# Altium PCB DSPpanel_v2.PcbDoc (part 2 of 2)
Units mil, origin at the board's own origin, x right, y up, seen from the top; angles counter-clockwise.
Board outline 3920 x 2100 mil, 2 copper layers (Top Layer, Bottom Layer); 189 components, 149 nets, 769 pads, 209 vias.
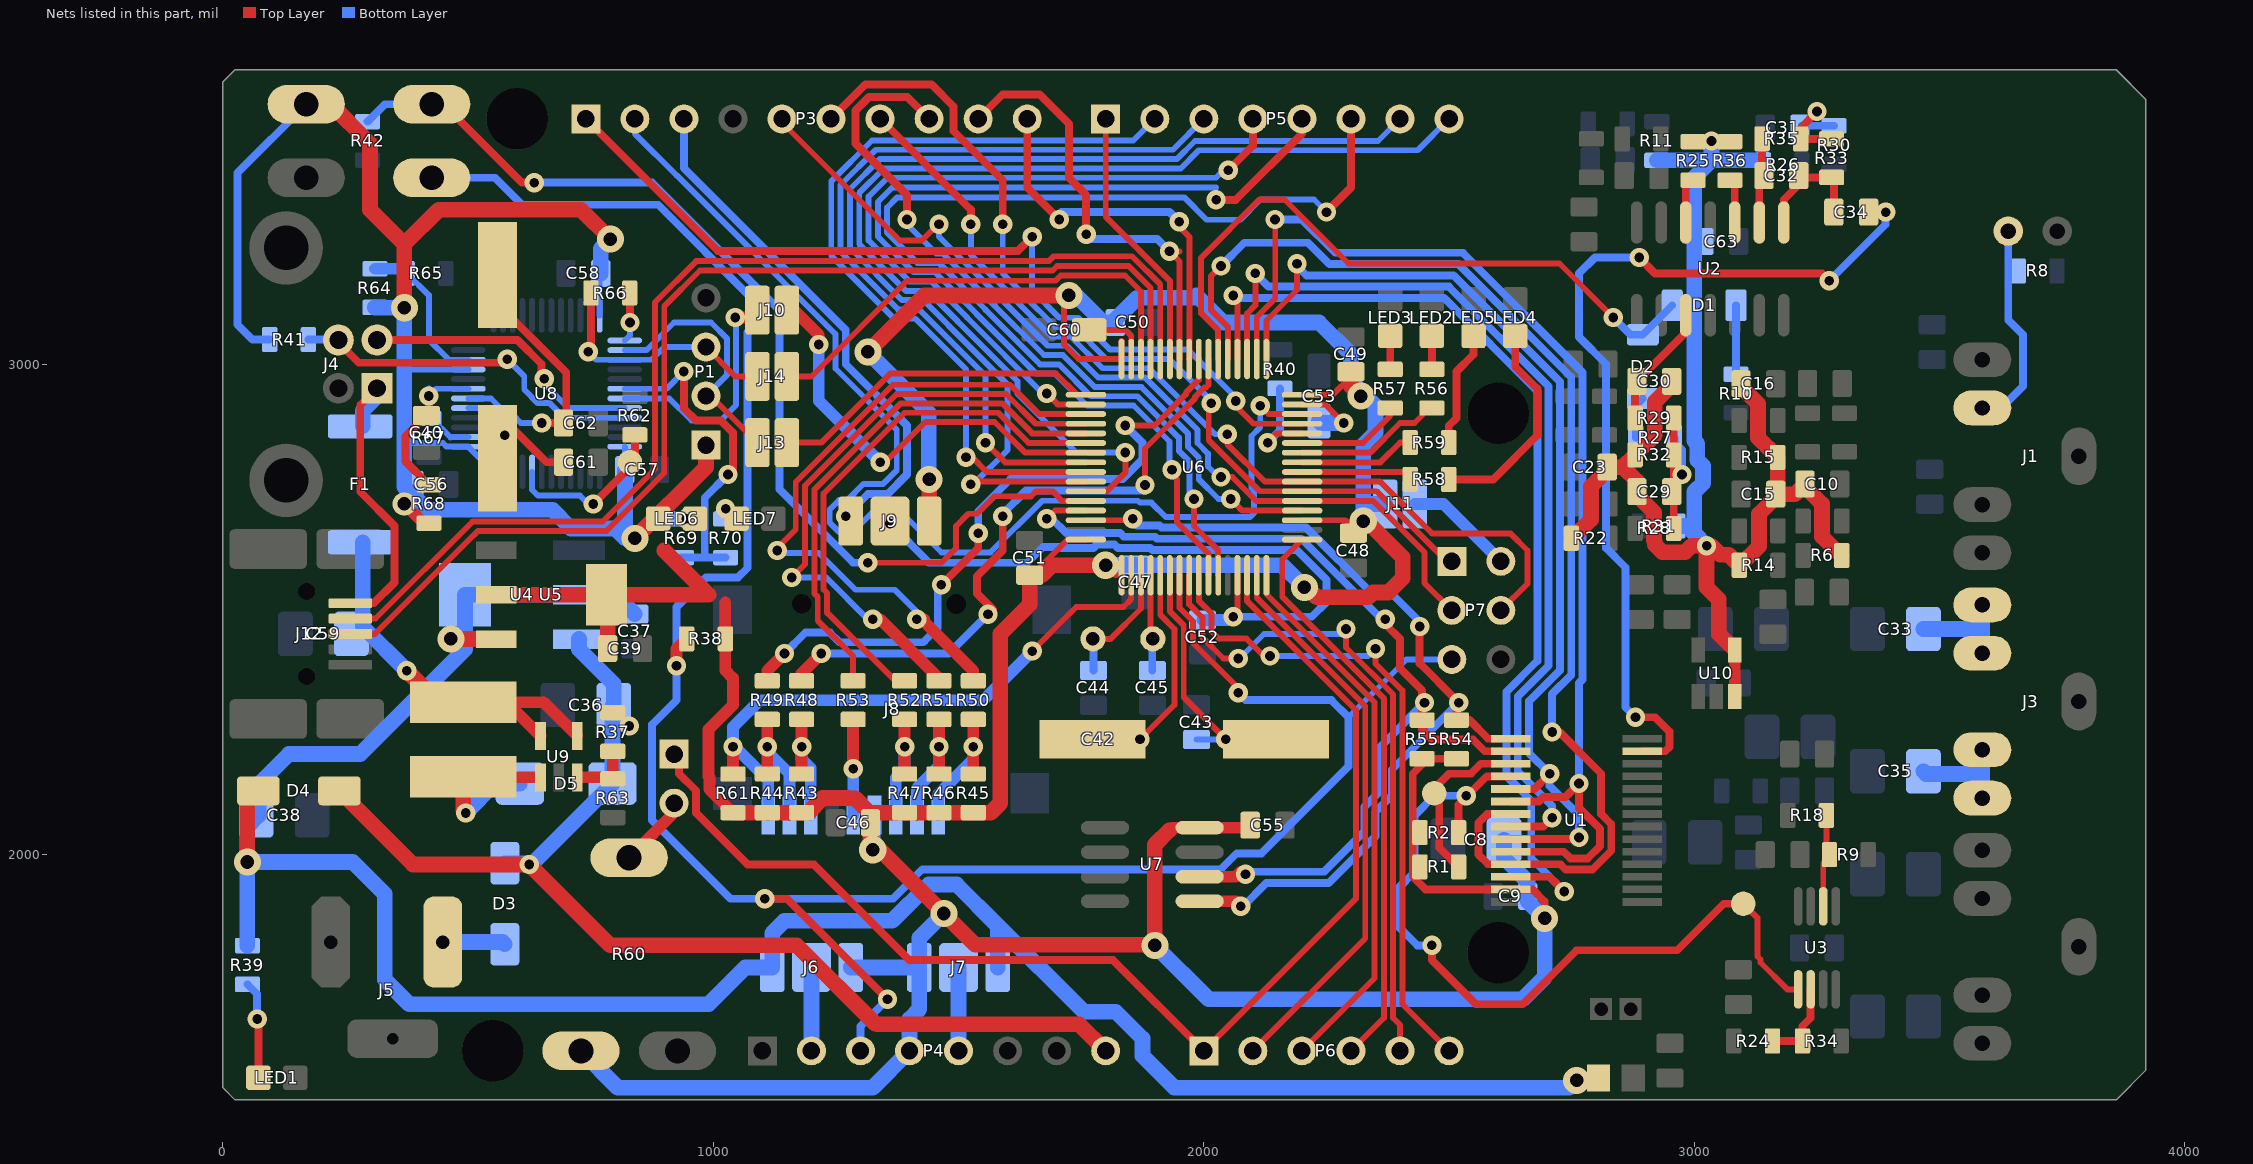
[diagram p2: the nets of this part, all layers, seen from the top]

## Via types
v1: diameter 39.37, hole 19.68, Top Layer to Bottom Layer, tented both sides, 146 vias
v2: diameter 55.12, hole 27.56, Top Layer to Bottom Layer, tented both sides, 49 vias
v3: diameter 59.06, hole 59.06, Top Layer to Bottom Layer, 9 vias
v4: diameter 47.24, hole 27.56, Top Layer to Bottom Layer, tented both sides, 3 vias
v5: diameter 39.37, hole 19.68, Top Layer to Bottom Layer, 2 vias

## Nets (pads, with @x,y where several pads share a name; then routed paths per layer and width w, separated by ;. In a path a pad name is that pad's centre, name@x,y a point inside that pad or via, vN(x,y) a via of type N, cw(c..) or ccw(c..) an arc to the next point about the centre after c; other vN are vias at no path point) (continued)
NetC29_1: C29.1 R27.2 R28.1 R29.2 R32.1 | length 309.7
  Top Layer w16: R28.1@2957.91,2665 2957.91,2736.06 C29.1@2953.98,2740 2957.91,2743.94 R32.1@2957.91,2815 R29.2@2957.91,2890
  Bottom Layer w16: R27.2@2959.37,2850 2959.37,2840.63 2975,2825 v1(2975,2775)
NetC30_1: C30.1 R29.1 U2.10 | length 252.5
  Top Layer w16: R29.1@2879.17,2890 2879.17,2961.06 C30.1@2883.11,2965 2982.48,3064.37 U2.10@2982.48,3099.72
NetC31_1: C31.1 R30.2 R33.2 R35.2 | length 197.5
  Top Layer w16: v1(3250,3515) 3217.01,3482.01 3217.01,3459.37 R33.2@3280,3459.37
  Bottom Layer w16: C31.1@3219.8,3485.91 R30.2@3285,3485.91
NetC32_1: C32.1 C34.2 R33.1 U2.1 | length 237.7
  Top Layer w12: C32.1@3212.91,3365.51 C32.1@3212.91,3384.21
  Top Layer w16: U2.1@3182.48,3288.7 3182.48,3335.08 C32.1@3212.91,3365.51 ; C32.1@3216.5,3380.63 R33.1@3280,3380.63 ; C34.2@3284.57,3310 R33.1@3284.57,3376.06
NetC32_2: C32.2 R35.1 U2.2 | length 170.5
  Top Layer w16: U2.2@3132.48,3288.7 3132.48,3374.65 C32.2@3142.05,3384.21 ; C32.2@3138.11,3388.15 R35.1@3138.11,3459.21
NetC33_2: C33.2 J3.2 J3.4 | length 218.6
  Bottom Layer w32: C33.2@3467.09,2460 3587.24,2460 ; J3.4@3587.24,2410.63 3587.24,2460 ; J3.2@3587.24,2509.06 3587.24,2460
NetC34_1: C34.1 U1.27 | length 1855.3
  Top Layer w16: v1(2880,2280) 2920,2280 2949.21,2250.79 2949.21,2219.21 2940.75,2210.75 U1.27@2893.86,2210.75 ; v1(2887.44,3217.56) 2920,3185 3260,3185 v1(3275,3170)
  Bottom Layer w16: v1(2880,2280) 2859.44,2300.56 2859.44,2585.75 2820.19,2625 2820.19,2999.97 2765,3055.16 2765,3185.19 2797.37,3217.56 v1(2887.44,3217.56) ; v1(3275,3170) 3390,3285 v1(3390,3310)
NetC35_2: C35.2 J3.3 J3.5 | length 220.8
  Bottom Layer w32: C35.2@3467.09,2170 3472.52,2164.57 3587.24,2164.57 ; J3.3@3587.24,2115.35 3587.24,2164.57 ; J3.5@3587.24,2213.78 3587.24,2164.57
NetC36_1: C36.1 D3.K D4.K D5.K P4.8 R37.2 U4.3 | length 2388.6
  Top Layer w32: D4.K@237.68,2130 387.68,1980 v1(625,1980) ; v1@630,1975 790,1815 1170,1815 1330,1655 1333.5,1655 1334.06,1654.44 1745.56,1654.44 P4.8@1800,1600
  Bottom Layer w32: D3.K@575,1982.68 622.32,1982.68 v1(625,1980) 629.49,1980 D5.K@794.49,2145 794.49,2302.4 C36.1@797.09,2305 797.09,2347.91 726.14,2418.86 U4.3@726.14,2439.45
  other v1: 828.46,2262.41
NetC40_2: C40.2 R68.2 U8.7 | length 307.2
  Top Layer w16: R68.2@420,2754.37 419.62,2754.37 372.44,2801.55 372.44,2852.87 C40.2@415,2895.43 420,2900.43 v1(420,2935)
  Bottom Layer w12: v1(420,2935) 434.84,2949.84 U8.7@500.55,2949.84 ; v1@420,2950 v1@420.16,2949.84
NetC42_1: C42.1 U6.5 Y1.2 | length 425.1
  Top Layer w12: v5(1870,2235) 1940,2305 1940,2460 1911.1,2488.9 U6.5@1911.1,2569.53
  Bottom Layer w12: C42.1@1820.43,2235 v5(1870,2235)
NetC43_1: C43.1 U6.6 Y1.1 | length 442
  Top Layer w12: U6.6@1930.79,2569.53 1930.79,2496.08 1959,2467.87 1959,2321 v5(2045,2235)
  Bottom Layer w12: C43.1@1985,2234.57 1985.43,2235 v5(2045,2235)
NetC44_2: C44.2 U6.3 Y2.2 | length 256.1
  Top Layer w12: Y2.2@1773.98,2440 1810,2440 1871.73,2501.73 U6.3@1871.73,2569.53
  Bottom Layer w16: Y2.2@1773.98,2440 1775,2438.98 C44.2@1775,2375.43
NetC45_2: C45.2 U6.4 Y2.1 | length 196.4
  Top Layer w12: U6.4@1891.42,2569.53 1891.42,2444.61 Y2.1@1896.02,2440
  Bottom Layer w16: C45.2@1895,2375.43 1895,2438.98 Y2.1@1896.02,2440
NetC52_2: C52.2 J9.2 U6.13 | length 1372.1
  Top Layer w12: v1(2060,2485) 2068.58,2493.58 U6.13@2068.58,2569.53
  Bottom Layer w16: v1(1360,2675) 1440,2595 1639.81,2595 1672.37,2627.56 1707.63,2627.56 1710.07,2625.12 1774.93,2625.12 1782.37,2632.56 1817.63,2632.56 1825.07,2625.12 1890.89,2625.12 1895.01,2621 2189.19,2621 2250,2560.19 2250,2515 2220,2485 v1(2060,2485)
  Bottom Layer w24: C52.2@1997,2478.43 2053.43,2478.43 v1(2060,2485)
NetC53_1: C53.1 U6.31 | length 151.8
  Top Layer w12: U6.31@2200.47,2917.95 2247.05,2917.95 v1(2285,2880)
  Bottom Layer w32: C53.1@2235,2883.82 2238.82,2880 v1(2285,2880)
NetC59_1: C59.1 F1.2 L2.1 U9.4 U9.5 | length 798.4
  Top Layer w24: L2.1@490,2310.79 L2.1@579.13,2310.79 ; U9.5@647.6,2242.32 L2.1@579.13,2310.79 ; U9.4@722.4,2242.32 653.94,2310.79 L2.1@579.13,2310.79
  Top Layer w32: v1(375,2375) 439.21,2310.79 L2.1@490,2310.79
  Bottom Layer w32: F1.2@285,2636.89 285,2465 v1(375,2375)
NetC60_1: C60.1 U6.47 | length 138.3
  Top Layer w12: C60.1@1766.18,3070 1840,3070 1852.05,3057.95 U6.47@1852.05,3010.47
NetC61_1: C61.1 U8.5 Y3.2 | length 247.5
  Top Layer w16: Y3.2@575,2885 660,2800 C61.1@694.57,2800
  Bottom Layer w12: U8.5@500.55,2910.47 539.53,2910.47 v1@577.5,2872.5
  other v1: 575,2855
NetC62_2: C62.2 U8.6 Y3.1 | length 571.4
  Top Layer w16: Y3.1@560,3182.01 560,3122.94 700,2982.94 700,2895 685,2880 v1(650,2880)
  Bottom Layer w12: U8.6@500.55,2930.16 546.71,2930.16 581.31,2895.56 591.8,2895.56 607.36,2880 v1(650,2880)
NetD1_A: D1.A D2.A U6.38 | length 1369.5
  Top Layer w12: U6.38@2029.21,3010.47 2029.21,3068.92 1994.44,3103.69 1994.44,3216.8 2113.2,3335.56 2164.44,3335.56 2295,3205 2725,3205 v1(2835,3095)
  Bottom Layer w16: v1(2835,3095) 2870.04,3059.96 D2.A@2895,3059.96 D1.A@2955.04,3120
NetD1_K: D1.K R10.2 | length 140.6
  Bottom Layer w16: D1.K@3084.96,3120 R10.2@3085,2979.37 R10.2@3085,2979.37
NetD2_K: D2.K R27.1 | length 86
  Bottom Layer w16: R27.1@2880.63,2850 2880.63,2915.67 D2.K@2895,2930.04
NetD3_A: D3.A J5.3 | length 128.3
  Bottom Layer w32: J5.3@448.62,1821.85 570.47,1821.85 D3.A@575,1817.32
NetD5_A: D5.A L2.2 U9.1 | length 362.3
  Top Layer w24: L2.2@490,2159.21 491.54,2157.68 U9.1@640,2157.68
  Top Layer w32: L2.2@490,2159.21 490,2090 v1(495,2085)
  Bottom Layer w32: v1(495,2085) 555,2145 D5.A@605.51,2145
NetF1_1: F1.1 J4.1 J12.1 | length 641.5
  Top Layer w16: J12.1@259.8,2512.87 307.87,2512.87 350,2555 350,2670 280,2740 280,2916.42 J4.1@314.37,2950.79
  Bottom Layer w32: F1.1@285,2873.11 285,2905 314.37,2934.37 J4.1@314.37,2950.79 J4.1@317.91,2947.24
NetJ1_4: J1.4 MIC1.1 R8.1 | length 429.8
  Bottom Layer w16: J1.4@3587.24,2910.63 3625.63,2910.63 3670,2955 3670,3060 3640,3090 MIC1.1@3640,3271.26
NetJ4_2: J4.2 U8.32 | length 589.2
  Top Layer w12: J4.2@309.21,3049.21 J4.2@314.37,3049.21
  Top Layer w16: J4.2@314.37,3049.21 600.79,3049.21 650,3000 v1@650,2967.5
  Bottom Layer w12: v1@647.5,2967.5 704.53,2910.47 U8.32@819.45,2910.47
  other v1: 655,2970
NetJ4_3: J4.3 R41.1 U8.33 | length 736.8
  Top Layer w12: J4.3@235,3049.84 J4.3@235.63,3049.21
  Top Layer w16: J4.3@235.63,3049.21 235.63,3044.37 277.28,3002.72 572.72,3002.72 v1(580,3010)
  Bottom Layer w12: v1(580,3010) 614.44,2975.56 614.44,2948.2 642.08,2920.56 666.8,2920.56 696.57,2890.79 U8.33@819.45,2890.79
  Bottom Layer w16: R41.1@174.37,3050 234.84,3050 J4.3@235.63,3049.21
NetJ6_2: J6.2 P4.2 | length 170
  Bottom Layer w32: P4.2@1200,1600 J6.2@1200,1770
NetJ7_2: J7.2 P4.5 | length 170
  Bottom Layer w32: P4.5@1500,1600 J7.2@1500,1770
NetJ8_1: J8.1 R45.1 R50.1 | length 279.9
  Top Layer w24: R45.1@1530,2164.37 v1(1530,2220) R50.1@1530,2275.63
  Bottom Layer w24: J8.1@1458.47,2081 1458.47,2123.47 1530,2195 v1(1530,2220)
NetJ8_2: J8.2 R46.1 R51.1 | length 268.8
  Top Layer w24: R46.1@1460,2164.37 v1(1460,2220) R51.1@1460,2275.63
  Bottom Layer w24: J8.2@1415.16,2081 1415.16,2135.16 1460,2180 v1(1460,2220)
NetJ8_3: J8.3 R47.1 R52.1 | length 257.8
  Top Layer w24: R47.1@1390,2164.37 v1(1390,2220) R52.1@1390,2275.63
  Bottom Layer w24: J8.3@1371.85,2081 1371.85,2156.85 1390,2175 v1(1390,2220)
NetJ8_5: J8.5 R53.1 | length 194.7
  Top Layer w24: v1(1285,2175) R53.1@1285,2275.63
  Bottom Layer w24: v1(1285,2175) 1285.24,2174.76 J8.5@1285.24,2081
NetJ8_7: J8.7 R43.1 R48.1 | length 258
  Top Layer w24: R43.1@1180,2164.37 v1(1180,2220) R48.1@1180,2275.63
  Bottom Layer w24: v1(1180,2220) 1180,2195 1198.62,2176.38 J8.7@1198.62,2081
NetJ8_8: J8.8 R44.1 R49.1 | length 269
  Top Layer w24: R44.1@1110,2164.37 R49.1@1110,2275.63
  Bottom Layer w24: v1(1110,2220) 1110,2210 1155.32,2164.68 J8.8@1155.32,2081
NetJ8_9: J8.9 R61.1 U6.2 | length 1235.5
  Top Layer w12: v1(1650,2415) 1740,2505 1836.36,2505 1852.05,2520.68 U6.2@1852.05,2569.53
  Top Layer w24: R61.1@1040,2164.37 v1(1040,2220)
  Bottom Layer w24: J8.9@1112.01,2081 1112.01,2151.73 1043.74,2220 v1(1040,2220) 1040,2260 1095,2315 1550,2315 v1(1650,2415)
NetJ9_1: J9.1 P3.3 | length 1073.7
  Bottom Layer w16: P3.3@940,3500 940,3399.81 1270,3069.81 1270,3000 1395,2875 1395,2775 1355,2735 1315,2735 v1(1270,2690)
NetJ10_1: J10.1 U8.31 | length 489.2
  Top Layer w24: v1(1045,3095) 1075,3095 J10.1@1090,3110
  Bottom Layer w12: U8.31@819.45,2930.16 910.16,2930.16 955.32,2885 1015,2885 1046.53,2916.53 1046.53,3093.47 v1(1045,3095)
NetJ10_2: J10.2 U6.55 | length 881
  Top Layer w12: v1@1345,2795 1432,2882 1573.16,2882 1635.63,2819.53 U6.55@1759.53,2819.53
  Top Layer w24: J10.2@1150,3110 1165,3110 1215,3060 v1(1215,3040)
  Bottom Layer w24: v1(1215,3040) 1215,2925 v1@1345,2795
  other v1: 1340,2800
NetJ11_2: J11.2 P7.2 | length 224
  Bottom Layer w24: J11.2@2430,2715 2488.54,2715 P7.2@2605.51,2598.03
NetJ12_2: J12.2 U6.44 | length 2332.3
  Top Layer w12: J12.2@259.8,2481.38 311.38,2481.38 509,2679 774,2679 881,2786 881,3126 965,3210 1683.9,3210 1693.9,3220 1853.74,3220 1911.1,3162.64 U6.44@1911.1,3010.47
NetJ12_3: J12.3 U6.45 | length 2305
  Top Layer w12: J12.3@259.8,2449.88 309.88,2449.88 503.46,2643.46 503.46,2643.65 511.07,2651.27 511.27,2651.27 520,2660 781.87,2660 900,2778.13 900,3118.13 972.87,3191 1691.77,3191 1700.77,3200 1846.87,3200 1891.42,3155.45 U6.45@1891.42,3010.47
NetJ13_1: J13.1 U6.49 | length 685.5
  Top Layer w12: J13.1@1150,2840 1220,2840 1360.56,2980.56 1698.79,2980.56 1741.71,2937.64 U6.49@1759.53,2937.64
NetJ13_2: J13.2 P1.2 U8.26 | length 524.4
  Top Layer w12: P1.2@985,2935 995,2935 J13.2@1090,2840
  Bottom Layer w12: U8.26@819.45,3028.58 863.58,3028.58 920,3085 995.14,3085 1027.53,3052.62 1027.53,2977.53 P1.2@985,2935
NetJ14_1: J14.1 U6.46 | length 958
  Top Layer w12: J14.1@1150,2975 1200,2975 1395,3170 1697.64,3170 1708.2,3180.56 1839.44,3180.56 1871.73,3148.27 U6.46@1871.73,3010.47
NetJ14_2: J14.2 P1.3 R66.1 U8.27 | length 501.7
  Top Layer w12: P1.3@985,3035 1045,2975 J14.2@1090,2975
  Top Layer w16: v1@750.63,3030.63 R66.1@750.63,3145
  Bottom Layer w12: v1(745,3025) 761.1,3008.9 U8.27@819.45,3008.9 873.9,3008.9 900,3035 P1.3@985,3035
NetLED1_A: LED1.A R39.1 | length 199.9
  Top Layer w16: v1(70,1665) 72.5,1662.5 LED1.A@72.5,1545
  Bottom Layer w16: R39.1@50,1735.63 70,1715.63 v1(70,1665)
NetLED2_A: LED2.A R56.1 | length 68.1
  Top Layer w16: R56.1@2465,2994.37 LED2.A@2465,3062.5
NetLED3_A: LED3.A R57.1 | length 68.1
  Top Layer w16: R57.1@2380,2994.37 LED3.A@2380,3062.5
NetLED4_A: LED4.A R58.1 | length 444
  Top Layer w16: R58.1@2499.37,2765 2590,2765 2680,2855 2680,2950 2635,2995 LED4.A@2635,3062.5
NetLED5_A: LED5.A R59.1 | length 243.5
  Top Layer w16: R59.1@2499.37,2840 2499.37,2874.37 2515,2890 2515,2985 2550,3020 LED5.A@2550,3062.5
NetLED6_K: LED6.K R69.2
  other v1: 945,2685
NetLED7_A: LED7.A R70.1
  other v1: 1025,2705
NetP3_1: P3.1 U6.29 | length 1824.5
  Top Layer w12: v1@2072.5,2927.5 2072.5,2907.5 2101.42,2878.58 U6.29@2200.47,2878.58
  Top Layer w16: P3.1@740,3500 1009,3231 1621,3231 v1(1650,3260)
  Bottom Layer w12: v1@1637.5,3267.5 1650,3255 1650,3150 1705.44,3094.56 1744.02,3094.56 1809.02,3029.56 1967.8,3029.56 v1@2067.36,2930
  other v1: 2065,2925
NetP3_2: P3.2 U6.30 | length 2448.3
  Top Layer w12: v1(2115,2915) 2131.73,2898.27 U6.30@2200.47,2898.27
  Bottom Layer w12: P3.2@840,3500 840,3470 925.04,3384.96 925.15,3384.96 1249,3061.11 1249,2991.3 1374,2866.3 1374,2783.7 1346.3,2756 1306.3,2756 1272.99,2722.69 1256.46,2722.69 1237.31,2703.54 1237.31,2676.46 1256.46,2657.31 1283.54,2657.31 1333.91,2707.69 1373.54,2707.69 1465.22,2616 1564.78,2616 1670.34,2721.56 1865.9,2721.56 1869.78,2717.69 1893.07,2717.69 1922.76,2688 2094.22,2688 2102.69,2696.46 2102.69,2742.31 2097.31,2747.69 2097.31,2853.54 2115,2871.22 v1(2115,2915)
NetP3_5: P3.5 P7.3 U6.21 | length 1912.7
  Top Layer w12: P3.5@1140,3492.64 1380.64,3252 1425,3252 1458,3285 v1(1460,3285) ; v1(2035,2770) 2058.13,2770 2107.03,2721.1 U6.21@2200.47,2721.1 2345.16,2721.1 2450,2616.26 2450,2553.54 P7.3@2505.51,2498.03
  Top Layer w16: P3.5@1140,3494.81 P3.5@1140,3500
  Bottom Layer w12: v1(1460,3285) 1467.64,3285 1460,3277.36 1460,3260 1593,3127 1593,3126.39 1681.83,3037.56 1720.41,3037.56 1785.41,2972.56 1880.41,2972.56 1987,2865.97 1987,2839.1 2008.56,2817.54 2008.56,2791.44 v1@2040,2760
NetP3_6: P3.6 P7.1 U6.22 | length 1913.9
  Top Layer w12: v1(2015,2920) 2020,2920 2025,2915 2020,2915 2010,2905 2010,2845 2114.21,2740.79 U6.22@2200.47,2740.79 2352.34,2740.79 2495.1,2598.03 P7.1@2505.51,2598.03
  Top Layer w16: P3.6@1240,3500 1310,3570 1445,3570 1490,3525 1490,3475 1590,3375 v1(1590,3285)
  Bottom Layer w12: v1(1590,3285) 1590,3185 1631,3144 1631,3142.13 1697.57,3075.56 1736.15,3075.56 1801.15,3010.56 1929.44,3010.56 2020,2920 v1(2015,2920)
NetP3_7: P3.7 P7.4 U6.23 | length 1895.7
  Top Layer w12: v1(2048,2857) 2048,2837 2124.53,2760.47 U6.23@2200.47,2760.47 2359.53,2760.47 2465,2655 2625,2655 2660,2620 2660,2552.52 P7.4@2605.51,2498.03
  Top Layer w16: P3.7@1340,3500 1525,3315 v1(1525,3285)
  Bottom Layer w12: v1(1525,3285) 1525,3223.13 1612,3136.13 1612,3134.26 1689.7,3056.56 1728.28,3056.56 1793.28,2991.56 1888.28,2991.56 2022.84,2857 v1(2048,2857)
NetP3_8: P3.8 U6.20 | length 1527.5
  Top Layer w12: v1@2055,2715 2065,2715 2078.58,2701.42 U6.20@2200.47,2701.42
  Top Layer w16: v1(1395,3295) 1395,3345 1290,3450 1290,3517 1317.53,3544.53 1395.47,3544.53 P3.8@1440,3500
  Bottom Layer w12: v1@1395,3285 1454.56,3225.44 1467.69,3225.44 1574,3119.13 1574,3118.52 1673.96,3018.56 1712.54,3018.56 1777.54,2953.56 1872.54,2953.56 1968,2858.1 1968,2831.23 1989.56,2809.67 1989.56,2765.44 2030,2725 2045,2725 v1@2050,2720
  other v1: 2055,2725
NetP3_9: P3.9 U6.42 | length 879.1
  Top Layer w12: v1(1930,3230) 1950.47,3209.53 U6.42@1950.47,3010.47 ; 1950,3230 1950.47,3229.53
  Top Layer w16: P3.9@1540,3500 1590,3550 1665,3550 1725,3490 1725,3380 1760,3345 v1(1760,3265)
  Bottom Layer w16: v1@1760,3255 1905,3255 v1(1930,3230)
NetP3_10: P3.10 U6.41 | length 761.3
  Top Layer w12: v1(1950,3290) 1950,3280 1970.56,3259.44 1970.56,3010.87 U6.41@1970.16,3010.47
  Top Layer w16: P3.10@1640,3500 1640,3360 v1@1700,3300
  Bottom Layer w16: v1@1710,3310 1930,3310 v1(1950,3290)
  other v1: 1705,3295
NetP4_3: P4.3 P7.5 R38.2 S1.1 U6.7 | length 4953.5
  Top Layer w12: U6.7@1950.47,2569.53 1950.47,2503.27 1978,2475.74 1978,2432 2080,2330 v1(2070,2330)
  Top Layer w16: v1(1105,1910) 1150,1910 v1(1355,1705)
  Top Layer w24: v1(925,2385) 925,2419.37 R38.2@945.63,2440
  Bottom Layer w12: 2295,2280 2413.03,2398.03 P7.5@2505.51,2398.03
  Bottom Layer w16: S1.1@425.91,3380 555,3380 610,3325 887.47,3325 1080,3132.47 1080,3075 1070,3065 1070,2585 1050,2565 985,2565 925,2505 v1(925,2385) 925,2315 875,2265 875,2070 1035,1910 v1(1105,1910) 1366.16,1910 1426.16,1970 2034.81,1970 2067.37,2002.56 2117.56,2002.56 2295,2180 2295,2280 2260,2315 2085,2315 ; P4.3@1300,1600 1300,1650 v1(1355,1705)
NetP5_1: P5.1 U6.43 | length 543.7
  Top Layer w12: P5.1@1800,3500 1800,3300.61 1930.79,3169.82 U6.43@1930.79,3010.47
NetP5_2: P5.2 U6.57 | length 1670.9
  Top Layer w12: v1(1515,2810) 1527.64,2810 1557.48,2780.16 U6.57@1759.53,2780.16
  Bottom Layer w12: v1(1515,2810) 1515,2989.43 1411.99,3092.44 1368.98,3092.44 1240.44,3220.98 1240.44,3372.92 1323.52,3456 1856,3456 P5.2@1900,3500
NetP5_3: P5.3 U6.56 | length 1690.3
  Top Layer w12: v1(1555,2840) 1595.16,2799.84 U6.56@1759.53,2799.84
  Bottom Layer w12: v1(1555,2840) 1555,2976.3 1419.86,3111.44 1376.85,3111.44 1259.44,3228.85 1259.44,3365.05 1331.39,3437 1937,3437 P5.3@2000,3500
NetP5_4: P5.4 U6.50 | length 1542.4
  Top Layer w12: v1(1680,2940) 1702.05,2917.95 U6.50@1759.53,2917.95
  Top Layer w16: v1(2050,3395) 2100,3445 P5.4@2100,3500
  Bottom Layer w12: v1(1680,2940) 1671.91,2940 1517,3094.91 1517,3095.52 1444.08,3168.44 1400.46,3168.44 1316.44,3252.46 1316.44,3341.44 1355,3380 2025,3380 v1@2040,3395
NetP5_5: P5.5 U6.10 | length 2116.7
  Top Layer w12: v1(1935,2785) 1930,2785 1930,2780 1945,2765 1945,2678.13 2009.53,2613.6 U6.10@2009.53,2569.53
  Top Layer w16: v1(2025,3335) 2065,3335 2200,3470 P5.5@2200,3500
  Bottom Layer w12: v1(1935,2785) 1930,2785 1930,2842.36 1856.8,2915.56 1761.8,2915.56 1696.8,2980.56 1658.22,2980.56 1536,3102.78 1536,3103.39 1451.95,3187.44 1408.33,3187.44 1335.44,3260.33 1335.44,3330.44 1365,3360 2025,3360
NetP5_6: P5.6 U6.11 | length 2279.9
  Top Layer w12: v1@1980,2718.75 1980,2670 2029.21,2620.79 U6.11@2029.21,2569.53
  Top Layer w16: v1(2250,3310) 2300,3360 P5.6@2300,3500
  Bottom Layer w12: v1@1970.56,2729.44 1970.56,2801.8 1949,2823.36 1949,2850.23 1864.67,2934.56 1769.67,2934.56 1704.67,2999.56 1666.09,2999.56 1555,3110.65 1555,3111.26 1459.82,3206.44 1416.2,3206.44 1354.44,3268.2 1354.44,3319.44 1375,3340 1960,3340 2005.56,3294.44 2074.44,3294.44 2115.56,3335.56 2224.44,3335.56 v1(2250,3310)
  other v1: 1980,2725
NetP5_7: P5.7 U6.58 | length 2197.2
  Top Layer w12: v1@1540,2765 1544.53,2760.47 U6.58@1759.53,2760.47
  Bottom Layer w12: v1@1530.19,2755 1600,2824.81 1600,2958.17 1479,3079.17 1479,3079.78 1428.34,3130.44 1384.72,3130.44 1278.44,3236.72 1278.44,3357.18 1339.26,3418 1944.87,3418 1981.87,3455 2355,3455 P5.7@2400,3500
  Bottom Layer w16: v1(1525,2755) v1@1530.19,2755
NetP5_8: P5.8 U6.59 | length 2234.8
  Top Layer w12: U6.59@1759.53,2740.79 1802.01,2740.79 1840,2778.78 v1@1840,2810
  Bottom Layer w12: v1@1840,2810 1830,2820 1739.81,2820 1620,2939.81 1620,2965.04 1498,3087.04 1498,3087.65 1436.21,3149.44 1392.59,3149.44 1297.44,3244.59 1297.44,3349.31 1347.13,3399 1952.74,3399 1989.74,3436 2436,3436 P5.8@2500,3500
  other v1: 1840,2820
NetP6_1: P6.1 P8.1 U6.14 | length 2560.2
  Top Layer w12: P6.1@2000,1600 2310,1910 2310,2295 2088.27,2516.73 U6.14@2088.27,2569.53
  Top Layer w16: P8.1@930,2205 930,2165 965,2130 965,2085 1070,1980 1205,1980 1400,1785 1815,1785 P6.1@2000,1600
NetP6_2: P6.2 U6.15 | length 1155.9
  Top Layer w12: P6.2@2100,1600 2329,1829 2329,2302.87 2107.95,2523.92 U6.15@2107.95,2569.53
NetP6_3: P6.3 U6.16 | length 1122.1
  Top Layer w12: U6.16@2127.64,2569.53 2127.64,2531.1 2348,2310.74 2348,1748 P6.3@2200,1600
NetP6_4: P6.4 U6.17 | length 1172.6
  Top Layer w12: U6.17@2200.47,2642.36 2160,2601.89 2160,2525.61 2367,2318.61 2367,1667 P6.4@2300,1600
NetP6_5: P6.5 U6.8 | length 1378.9
  Top Layer w12: U6.8@1970.16,2569.53 1970.16,2510.45 1997,2483.61 1997,2443 2040,2400 v1(2070,2400) ; v1(2290,2460) 2290,2422.48 2386,2326.48 2386,1667 2400,1653 P6.5@2400,1600
  Bottom Layer w12: v1(2070,2400) 2072.64,2400 2122.64,2450 2280,2450 v1(2290,2460)
NetP6_6: P6.6 U6.9 | length 1368.4
  Top Layer w12: U6.9@1989.84,2569.53 1989.84,2517.64 2016,2491.48 2016,2455 2030.44,2440.56 2086.8,2440.56 2122.36,2405 v1(2135,2405) ; v1(2350,2420) 2350,2389.35 2405,2334.35 2405,1695 P6.6@2500,1600
  Bottom Layer w12: v1(2135,2405) 2335,2405 v1(2350,2420)
NetP8_2: P8.2 R60.2 | length 153.4
  Top Layer w24: R60.2@828.43,1993.7 930,2095.28 P8.2@930,2105
NetR1_2: R1.2 TP1.1 U1.3 | length 349.1
  Top Layer w16: R1.2@2519.37,1975 2480,2014.37 2480,2145 2499.88,2164.88 2544.5,2164.88 2564.77,2185.16 U1.3@2626.14,2185.16
NetR2_2: R2.2 TP2.1 U1.4 U3.5 | length 1656.1
  Top Layer w12: TP2.1@3100,1900 3128.57,1871.43 3128.57,1792.84 3135,1786.4 3135,1780 3189.65,1725.35 U3.5@3211.61,1725.35
  Top Layer w16: v1(2465,1815) 2465,1785 2555,1695 2650,1695 2760,1805 2965,1805 3060,1900 TP2.1@3100,1900 ; R2.2@2519.37,2045 2519.37,2101.84 2577.09,2159.57 U1.4@2626.14,2159.57
  Bottom Layer w16: v1(2465,1815) 2435,1815 2395,1855 2395,1930 2430,1965 2430,2080 2470,2120 v1(2535,2120)
NetR9_2: R9.2 R18.1 U3.2 | length 188.1
  Top Layer w12: U3.2@3262.8,1894.65 3262.8,1982.17 3269.37,1988.74 R18.1@3269.37,2080
NetR24_1: R24.1 R34.2 U3.6 | length 174
  Top Layer w12: R34.2@3220,1620.63 R34.2@3220.63,1620
  Top Layer w16: R24.1@3159.37,1620 R34.2@3220.63,1620 ; R34.2@3220,1620.63 3220,1650 3237.2,1667.2 U3.6@3237.2,1725.35
NetR25_1: R25.1 U2.5 | length 92.4
  Top Layer w16: U2.5@2982.48,3288.7 2982.48,3359.84 R25.1@2997.48,3374.84
NetR36_1: R36.1 U2.3 | length 90.3
  Top Layer w16: R36.1@3072.48,3374.84 3082.48,3364.84 U2.3@3082.48,3288.7
NetR37_1: R37.1 R63.2 U9.3 | length 122.6
  Top Layer w24: U9.3@730,2157.68 791.69,2157.68 R63.2@795,2154.37 R37.1@795,2210.63
NetR40_2: R40.2 U6.28 | length 188.7
  Top Layer w12: v1(2130,2840) 2148.9,2858.9 U6.28@2200.47,2858.9
  Bottom Layer w16: v1@2137.5,2847.5 2155,2865 R40.2@2155,2950.63
NetR42_2: R42.2 S2.1 U6.60 | length 2185.6
  Top Layer w12: v1(1315,2595) 1465,2595 1495,2625 1495,2670 1520,2695 1537.64,2695 1573.2,2730.56 1606.8,2730.56 1607.36,2730 1647.64,2730 1658.2,2740.56 1691.8,2740.56 1711.26,2721.1 U6.60@1759.53,2721.1
  Top Layer w16: S2.1@425.91,3530 450,3530 610,3370 v1(635,3370)
  Bottom Layer w16: R42.2@295,3494.37 330.63,3530 S2.1@425.91,3530 ; v1@625,3370 v1(635,3370) 875,3370 1135,3110 1135,2745 1285,2595 v1(1315,2595)
NetR48_2: R48.2 U6.39 | length 1350.7
  Top Layer w12: v1@1885,2745 1880,2750 1880,2828.13 1982.31,2930.44 1982.31,2933.54 2001.46,2952.69 2004.56,2952.69 2009.53,2957.66 U6.39@2009.53,3010.47
  Top Layer w16: v1@1570,2485 1570,2499.81 1537.44,2532.37 1537.44,2567.63 1590,2620.19 v1(1590,2690) v1@1585,2685
  Top Layer w24: R48.2@1180,2354.37 1180,2370 v1(1220,2410)
  Bottom Layer w16: v1(1220,2410) 1480,2410 v1(1560,2490) ; v1(1590,2690) 1590,2695 1637.56,2742.56 1880.12,2742.56 1882.56,2745 1880,2745 v1(1880,2753.68) 1881.32,2755 v1@1885,2755
NetR49_2: R49.2 U6.40 | length 1377.3
  Top Layer w12: v1(1840,2875) 1900,2875 1963.31,2938.31 1963.31,2941.41 1989.84,2967.94 U6.40@1989.84,3010.47
  Top Layer w16: v1(1465,2550) 1540,2625 v1@1540,2640
  Top Layer w24: R49.2@1110,2354.37 1110,2375 v1(1145,2410)
  Bottom Layer w16: v1(1145,2410) 1187.56,2452.56 1237.63,2452.56 1257.19,2433 1428,2433 1430,2435 1430.19,2435 1457.56,2462.37 1457.56,2542.56 v1(1465,2550) ; v1@1540,2650 1540,2700.19 1605.37,2765.56 1834.61,2765.56 1874.69,2805.63 1874.69,2840.31 v1(1840,2875)
  other v1: 1540,2655
NetR50_2: R50.2 U6.51 | length 1342.8
  Top Layer w12: v1@1140,2635 1168,2663 1168,2759.87 1366.13,2958 1604.64,2958 1664.37,2898.27 U6.51@1759.53,2898.27
  Top Layer w24: v1@1430,2480 1430,2475 1530,2375 R50.2@1530,2354.37
  Bottom Layer w12: v1@1145,2615 1215,2615 1290,2540 1370,2540 v1@1430,2480
  other v1: 1415,2480 1130,2620
NetR51_2: R51.2 U6.52 | length 1266.6
  Top Layer w12: v1@1160,2566.45 v1(1160,2565) 1187,2592 1187,2752 1374,2939 1596.77,2939 1657.19,2878.58 U6.52@1759.53,2878.58
  Top Layer w24: v1(1325,2480) 1340,2480 1460,2360 R51.2@1460,2354.37
  Bottom Layer w12: v1@1160,2566.45 v1(1160,2565) 1230,2565 1315,2480 v1(1325,2480)
NetR52_2: R52.2 U6.54 | length 1089.9
  Top Layer w12: R52.2@1390,2354.37 1370.63,2354.37 1232,2493 1232,2533.43 1225,2540.43 1225,2736.26 1389.74,2901 1581.03,2901 1642.82,2839.21 U6.54@1759.53,2839.21
NetR53_2: R53.2 U6.53 | length 1074.2
  Top Layer w12: R53.2@1285,2354.37 1285,2405 1213,2477 1213,2525.56 1206,2532.56 1206,2744.13 1381.87,2920 1588.9,2920 1650,2858.9 U6.53@1759.53,2858.9
NetR54_1: R54.1 U1.1 U6.62 U7.5 | length 1912
  Top Layer w12: U6.62@1759.53,2681.73 1851.73,2681.73 v1(1855,2685)
  Top Layer w16: v1(2440,2465) 2440,2390 2515,2315 R54.1@2515,2274.37 2541.62,2274.37 2579.65,2236.34 U1.1@2626.14,2236.34
  Top Layer w24: U7.5@1991.46,1905 2065,1905 v1(2075,1895)
  Bottom Layer w16: v1@1845,2690 1863.88,2671.12 1909.94,2671.12 1914.06,2667 2208.24,2667 2345.24,2530 2385,2530 2435,2480 v1@2435,2455 ; v1(2075,1895) 2080.19,1895 2127.19,1942 2254.53,1942 2350,2037.47 2350,2087.47 2383,2120.47 2383,2173 v1(2520,2310)
NetR55_1: R55.1 U1.2 U6.61 U7.6 | length 2004.4
  Top Layer w12: v1(1680,2685) 1696.42,2701.42 U6.61@1759.53,2701.42
  Top Layer w16: v1(2370,2480) 2370,2470 2400,2440 2400,2380 2445,2335 R55.1@2445,2274.37 2445,2255 2465,2235 2548.46,2235 2572.72,2210.75 U1.2@2626.14,2210.75
  Top Layer w24: U7.6@1991.46,1955 2065,1955 v1@2075,1965
  Bottom Layer w16: v1(1680,2685) 1690,2685 1719.44,2655.56 1829.44,2655.56 1836.88,2648.12 1900.42,2648.12 1904.53,2644 2198.71,2644 2362.71,2480 v1(2370,2480) ; v1@2075,1965 2245,1965 2327,2047 2327,2097 2360,2130 2360,2220 v1(2450,2310)
  other v1: 2085,1960
NetR56_2: R56.2 U6.26 | length 304.3
  Top Layer w12: U6.26@2200.47,2819.53 2339.53,2819.53 2400,2880 2429.37,2880 R56.2@2465,2915.63
NetR57_2: R57.2 U6.27 | length 223.3
  Top Layer w12: U6.27@2200.47,2839.21 2324.21,2839.21 2380,2895 R57.2@2380,2915.63
NetR58_2: R58.2 U6.24 | length 226.4
  Top Layer w12: U6.24@2200.47,2780.16 2405.47,2780.16 R58.2@2420.63,2765
NetR59_2: R59.2 U6.25 | length 236.8
  Top Layer w12: U6.25@2200.47,2799.84 2359.84,2799.84 2400,2840 R59.2@2420.63,2840
NetR62_2: R62.2 TP3.1 U8.44 | length 338.9
  Top Layer w16: v1(755,2715) 830,2790 TP3.1@830,2800 840,2810 R62.2@840,2855.63
  Bottom Layer w12: U8.44@630.47,2780.55 630.47,2743.97 642.33,2732.12 727.88,2732.12 v1@745,2715
NetR64_1: R64.1 R65.2 U8.10 | length 320.5
  Bottom Layer w12: R65.2@375.63,3185 420,3140.63 420,3050 461.1,3008.9 U8.10@500.55,3008.9
  Bottom Layer w24: R64.1@310,3194.37 366.26,3194.37 R65.2@375.63,3185
NetR66_2: R66.2 U8.25 | length 100.5
  Top Layer w16: v1(830,3085) R66.2@830,3144.37
  Bottom Layer w12: U8.25@819.45,3048.27 830,3058.82 v1(830,3085)
NetR67_1: R67.1 U8.2 | length 96.8
  Bottom Layer w12: R67.1@420,2889.37 425.55,2889.37 464.18,2850.73 464.87,2851.42 U8.2@500.55,2851.42
NetR69_1: R69.1 R70.2 U8.30 | length 696.1
  Top Layer w16: v1(940,2985) 940,2910 965,2885 1015.3,2885 1040,2860.3 v1@1040,2775
  Bottom Layer w12: U8.30@819.45,2949.84 904.84,2949.84 v1(940,2985)
  Bottom Layer w16: R69.1@935,2605.63 980,2605.63 ; R70.2@1025,2605.63 980,2605.63 ; v1(1030,2775) 982.5,2727.5 982.5,2608.13 980,2605.63
NetU1_5: U1.5 U1.9 U6.33 | length 2111.3
  Top Layer w12: U6.33@2127.64,3010.47 2127.64,3088.9 2190,3151.26 v1(2190,3205)
  Top Layer w16: U1.9@2626.14,2031.61 2761.61,2031.61 v1(2765,2035) 2760,2040 v1@2752.44,2032.44 ; U1.5@2626.14,2133.98 2673.98,2133.98 2700,2160 2705,2160 v1(2705,2165)
  Bottom Layer w16: v1@2185,3205 2209,3181 2509.05,3181 2726,2964.05 2726,2375.95 2663,2312.95 2663,2207 v1(2705,2165) 2705,2140 2727.44,2117.56 2727.63,2117.56 2765,2080.19 v1(2765,2035)
NetU1_6: U1.6 U1.10 U6.34 | length 2394.2
  Top Layer w12: U6.34@2107.95,3010.47 2107.95,3096.08 2145.56,3133.69 2145.56,3294.44 v1(2145,3295)
  Top Layer w16: U1.10@2626.14,2006.02 2733.79,2006.02 2747.37,1992.44 2782.63,1992.44 2807.56,2017.37 2807.56,2052.63 2765,2095.19 v1(2765,2145) 2737.56,2117.56 2692.37,2117.56 2683.2,2108.39 U1.6@2626.14,2108.39
  Bottom Layer w16: v1(2145,3295) 2200,3295 2268,3227 2528.11,3227 2772,2983.11 2772,2356.89 2765,2349.89 v1(2765,2145)
NetU1_7: U1.7 U1.11 U6.37 | length 2532.3
  Top Layer w12: v1(2035,3200) 2015,3180 2015,3110 2048.9,3076.1 U6.37@2048.9,3010.47
  Top Layer w16: U1.7@2626.14,2082.8 2577.8,2082.8 2560,2065 2560,2000 2579.57,1980.43 U1.11@2626.14,1980.43 2726.85,1980.43 2737.84,1969.44 2792.16,1969.44 2830.56,2007.84 2830.56,2062.16 2810,2082.71 2810,2165 v1@2725,2250
  Bottom Layer w16: v1@2025,3200 v1(2035,3200) 2082.56,3247.56 2212.44,3247.56 2256,3204 2518.58,3204 2749,2973.58 2749,2366.42 2710,2327.42 v1(2710,2250)
NetU1_8: U1.8 U6.35 | length 1900.8
  Top Layer w12: U6.35@2088.27,3010.47 2088.27,3103.27 2105,3120 v1(2105,3185)
  Top Layer w16: U1.8@2626.14,2057.2 2692.2,2057.2 v1(2710,2075)
  Bottom Layer w16: v1(2105,3185) 2132,3158 2499.53,3158 2703,2954.53 2703,2385.47 2640,2322.47 2640,2169.81 2710,2099.81 v1(2710,2075)
NetU1_12: U1.12 U6.36 | length 2028.8
  Top Layer w12: v1(2060,3140) 2068.58,3131.42 U6.36@2068.58,3010.47
  Top Layer w16: U1.12@2626.14,1954.84 2705.16,1954.84 2720,1940
  Bottom Layer w16: v1(2060,3140) 2065,3135 2490,3135 2680,2945 2680,2395 2617,2332 2617,2160.29 2667.44,2109.84 2667.44,1992.56 v1(2735,1925)
VCC: C37.2 C38.1 D4.A J6.1 J7.3 L1.1 R39.2 U4.2 U4.4 U5.3 | length 4930.9
  Top Layer w32: v2(50,1985) 50,2107.68 D4.A@72.32,2130 ; v2(465,2440) 465.55,2439.45 U5.3@557.8,2439.45
  Bottom Layer w32: R39.2@50,1814.37 v2(50,1985) ; C37.2@840,2490.43 800.43,2530 U4.2@726.14,2530 U4.4@493.86,2530 493.86,2418.86 280,2205 135,2205 72.91,2142.91 72.91,2080 50,2057.09 v2(50,1985) ; J7.3@1580,1770 1580,1855 ; v2@2745,1525 1940,1525 1875,1590 1875,1625 1820,1680 1755,1680 1580,1855 ; v2(50,1985) 265,1985 330,1920 330,1745 380,1695 990,1695 1065,1770 J6.1@1120,1770 1120,1840 1145,1865 1365,1865 1439,1939 1496,1939 1580,1855
  other v2: 2760,1540
VDD: C8.1 C9.1 C39.2 C46.2 C47.2 C48.2 C49.2 C50.2 C51.2 C55.2 C56.2 C57.2 C58.2 J6.3 J7.1 J8.4 J9.3 J11.1 LED6.A P1.1 P4.4 R1.1 R2.1 R38.1 R41.2 R43.2 R44.2 R45.2 R46.2 R47.2 R54.2 R55.2 R60.1 R61.2 R64.2 R68.1 S2.2 U1.13 U5.2 U5.4 U6.1 U6.19 U6.32 U6.48 U6.64 U7.8 U8.1 U8.9 U8.24 U8.36 U8.48 | length 13587.5
  Top Layer w12: C51.2@1645,2569.57 C51.2@1645.04,2569.53 ; C51.2@1649.57,2569.57 1722.36,2642.36 U6.64@1759.53,2642.36 ; v2(1725,3140) 1715,3130 1715,3040 1744.53,3010.47 U6.48@1832.36,3010.47 U6.48@1832.36,3047.64 ; v2(1800,2590) 1820.47,2569.53 U6.1@1832.36,2569.53 ; U6.19@2200.47,2681.73 2288.7,2681.73 C48.2@2305,2665.43 ; U6.32@2200.47,2937.64 2263.07,2937.64 C49.2@2300,2974.57
  Top Layer w16: R54.2@2515,2195.63 R55.2@2445,2195.63 2445,2184 2426,2165 2426,1955 2451.75,1929.25 U1.13@2626.14,1929.25 2669.99,1929.25 2695,1904.24 v2(2695,1870) v2@2695,1860
  Top Layer w24: v4(370,2715) 409.37,2675.63 R68.1@420,2675.63 ; 1024.37,2514.37 R38.1@1024.37,2440 1024.37,2375.63 1040,2360 1040,2305 990,2255 990,2160 992,2158 992,2133.63 R61.2@1040,2085.63 ; 1930,2050 1935,2055 U7.8@1991.46,2055 2089.57,2055 C55.2@2094.57,2060
  Top Layer w32: S2.2@170,3530 220,3530 300,3450 300,3315 370,3245 ; v2(370,3115) 370,3245 ; U5.2@557.8,2530 U5.4@782.2,2530 990,2530 900,2620 ; C39.2@784.57,2420 U5.4@784.57,2527.64 ; v2(790.14,3255) 730.14,3315 440,3315 370,3245 ; v2(840,2645) 985,2790 P1.1@985,2835 ; R61.2@1040,2085.63 R44.2@1110,2085.63 R43.2@1180,2085.63 1193.31,2085.63 1223.24,2115.56 1275.9,2115.56 1276.46,2115 1289.13,2115 1318.5,2085.63 R47.2@1390,2085.63 R46.2@1460,2085.63 R45.2@1530,2085.63 1565.63,2085.63 1585,2105 1585,2450 1645,2510 C51.2@1645,2569.57 1649.57,2569.57 1669.57,2569.57 1690,2590 v2(1800,2590) ; C46.2@1320.43,2065 1320.43,2029.57 v2(1470,1880) 1534,1816 1899,1816 v2(1900,1815) 1900,2020 1930,2050 ; v2@1325,3035 1430,3140 v2(1725,3140) ; J9.3@1440,2680 v2(1440,2765) ; v2@2207.5,2547.5 2230,2525 2335,2525 2344.44,2534.44 2375.94,2534.44 2405.56,2564.06 2405.56,2605.94 2331.5,2680 v2(2325,2680) ; C49.2@2300,2984.57 2300,2974.57 2300,2955 v2(2320,2935)
  Bottom Layer w12: 370,2815 373,2828 ; 370,2825 373,2828 ; 370,2990 370.79,2989.21 U8.9@500.55,2989.21 ; 376.73,2831.73 373,2828 ; U8.48@551.73,2780.55 U8.1@500.55,2831.73 456.31,2831.73 448.67,2839.38 375.62,2839.38 373,2828 ; U8.24@768.27,3099.45 C58.2@768.27,3182.83 ; U8.36@819.45,2831.73 820,2831.18 C57.2@820,2784.57
  Bottom Layer w16: R41.2@95.63,3050 60.63,3050 30,3080.63 30,3390 S2.2@170,3530
  Bottom Layer w24: v2(1325,2010) 1328.55,2013.55 J8.4@1328.55,2081
  Bottom Layer w32: R64.2@310,3115.63 310.63,3115 v2(370,3115) ; v2@375,3110 v2(370,3115) ; R60.1@730,1600 805,1525 1325,1525 P4.4@1400,1600 1400,1665 1420,1685 J7.1@1420,1770 ; C58.2@770.43,3185 770.43,3235.29 v2(790.14,3255) ; C57.2@820,2784.57 820,2665 v2(840,2645) 820,2645 800,2665 710,2665 672,2703 417,2703 370,2750 370,2815 370,2825 370,2990 v2(370,3115) ; J6.3@1280,1770 J7.1@1420,1770 ; v2(1315,3025) 1439.44,2900.56 v2@1439.44,2780 ; v2(1470,1880) 1420,1830 J7.1@1420,1770 ; v2@1735,3145 1795,3085 C50.2@1819.57,3085 1819.57,3091.02 1864.1,3135.56 1980.56,3135.56 1985,3140 2040,3085 2235,3085 2300,3020 2300,2965 2350,2915 2350,2860 2325,2835 2325,2715 ; v2(1800,2590) 1800.43,2590.43 C47.2@1860,2590.43 1860.43,2590 2160,2590 2200,2550 v2@2205,2550 ; v2(1900,1815) 2010,1705 2650,1705 2695,1750 v2(2695,1870) 2660.43,1904.57 C9.1@2660.43,1915 2660.43,1944.57 2612.09,1992.91 C8.1@2612.09,2030 ; v2(2325,2680) 2325,2715 ; J11.1@2370,2715 2325,2715
  other v2: 2205,2545
VGND: C10.2 C15.2 C16.2 C23.2 C29.2 C30.2 C63.1 R6.1 R11.2 R14.1 R15.2 R22.1 R25.2 R26.2 R31.1 R32.2 R36.2 U10.3 U10.4 | length 2976.7
  Top Layer w24: U10.4@3070,2425 3082.4,2412.6 U10.3@3082.4,2322.76
  Top Layer w32: R22.1@2749.17,2645 2750.73,2645 2789.17,2683.43 2789.17,2750.74 2822.4,2783.98 C23.2@2822.4,2790 2854.17,2790 R32.2@2879.17,2815 ; C30.2@2953.98,2965 2953.98,2957.62 2919.17,2922.81 2919.17,2854.99 R32.2@2879.17,2815 ; U10.4@3070,2429.65 3050,2449.65 3050,2520 3025,2545 v1(3025,2630) ; C16.2@3095.2,2960 3095.2,2953.98 3130.01,2919.17 3130.01,2849.99 R15.2@3170,2810 3170,2738.94 C15.2@3166.06,2735 ; R6.1@3300.43,2610 3298.87,2610 3260.44,2648.43 3260.44,2714.8 3225.63,2749.61 C10.2@3225.63,2755.63 3205,2735 C15.2@3166.06,2735 ; R32.2@2879.17,2815 2879.17,2814.17 2855,2790 2883.11,2761.89 C29.2@2883.11,2740 2883.11,2732.62 2917.92,2697.81 2917.92,2641.35 2919.17,2640.11 2919.17,2632.19 2934.94,2616.41 2980.88,2616.41 2994.47,2630 v1(3025,2630) ; v1(3025,2630) 3034.35,2630 3052.94,2611.41 3070.28,2611.41 R14.1@3091.69,2590 3093.25,2590 3131.69,2628.43 3131.69,2694.6 3166.06,2728.98 C15.2@3166.06,2735
  Bottom Layer w32: R11.2@2923.46,3415.63 3035,3415.63 ; R31.1@2966.34,2670 2985,2670 3000,2655 ; v1(3025,2630) 3000,2655 ; v1(3035,3455) 3035,3415.63 ; R26.2@3140.63,3406.54 3131.54,3415.63 3035,3415.63 ; 3000,2655 3000,2739.63 3017.69,2757.32 3017.69,2792.68 3006,2804.37 3006,2837.84 3000,2843.84 3000,3380.63 3035,3415.63
pads on no net: C1.0 C2.0 C3.0 C4.0 C5.0 C6.0 C7.0 C8.0 C9.0 C10.0 C11.0 C12.0 C13.0 C14.0 C15.0 C16.0 C17.0 C18.0 C19.0 C20.0 C21.0 C22.0 C23.0 C24.0 C25.0 C26.0 C27.0 C28.0 C29.0 C30.0 C31.0 C32.0 C33.0 C34.0 C35.0 C36.0 C37.0 C38.0 C39.0 C40.0 C41.0 C42.0 C43.0 C44.0 C45.0 C46.0 C47.0 C48.0 C49.0 C50.0 C51.0 C52.0 C53.0 C54.0 C55.0 C56.0 C57.0 C58.0 C59.0 C60.0 C61.0 C62.0 C63.0 D1.0 D2.0 D3.0 D4.0 D5.0 F1.0 J6.SM J7.SM J8.MH1 J8.MH2 J9.SM J10.SM J11.SM J12.4 J12.H1 J12.H2 J13.SM J14.SM LED1.0 LED2.0 LED3.0 LED4.0 LED5.0 LED6.0 LED7.0 P4.1 R1.0 R2.0 R3.0 R4.0 R5.0 R6.0 R7.0 R8.0 R9.0 R10.0 R11.0 R12.0 R13.0 R14.0 R15.0 R16.0 R17.0 R18.0 R19.0 R20.0 R21.0 R22.0 R23.0 R24.0 R25.0 R26.0 R27.0 R28.0 R29.0 R30.0 R31.0 R32.0 R33.0 R34.0 R35.0 R36.0 R37.0 R38.0 R39.0 R40.0 R41.0 R42.0 R43.0 R44.0 R45.0 R46.0 R47.0 R48.0 R49.0 R50.0 R51.0 R52.0 R53.0 R54.0 R55.0 R56.0 R57.0 R58.0 R59.0 R61.0 R62.0 R63.0 R64.0 R65.0 R66.0 R67.0 R68.0 R69.0 R70.0 U1.24 U1.26 U8.3 U8.4 U8.11 U8.12 U8.13 U8.14 U8.15 U8.16 U8.17 U8.18 U8.19 U8.21 U8.22 U8.28 U8.29 U8.34 U8.37 U8.38 U8.39 U8.40 U8.41 U8.42 U8.43 U8.45 U8.46
copper on no net:
  other v3: 3784.09,1615.35 3587.24,1812.2 3784.09,2009.06 3784.09,2115.35 3587.24,2312.2 3784.09,2509.06 3784.09,2615.35 3587.24,2812.2 3784.09,3009.06

## Polygon pours and split planes (outlines as drawn)
GND on Top Layer "Bottom Layer-No Net" (solid, remove dead copper, pour order 8): 25,3600 2650,3600 2650,3255 2750,3155 2750,3065 2705,3020 2705,2630 2850,2485 2850,1500 25,1500 0,1525 0,3575 25,3600
AGND on Top Layer "Bottom Layer-No Net" (solid, remove dead copper, pour order 7): 2650,3600 3860,3600 3920,3540 3920,1560 3860,1500 2850,1500 2850,2485 2705.63,2629.37 2705.63,3020.63 2750,3065 2750,3155 2650,3255 2650,3600
GND on Bottom Layer "Bottom Layer-No Net" (solid, remove dead copper, pour order 5): 25,3600 2650,3600 2650,3255 2735,3170 2735,3050 2700,3015 2700,2635 2840,2495 2840,1500 25,1500 0,1525 0,3575 25,3600
AGND on Bottom Layer "Bottom Layer-No Net" (solid, remove dead copper, pour order 6): 2650,3600 3860,3600 3920,3540 3920,1560 3860,1500 2840,1500 2840,2495 2700,2635 2700,3015 2735,3050 2735,3170 2650,3255 2650,3600

## Other copper
Top Layer:
  rectangle net VDD: 610,2335 805,2460
  rectangle net VDD: 915,2480 1065,2640
  rectangle net VDD: 610,2460 915,2640
  text "v2.0" at 1560,1940 h40
Bottom Layer:
  rectangle net VCC: 310,2475 360,2605
  rectangle net VCC: 360,2440 420,2680
  rectangle net VCC: 420,2365 660,2680
  text "DSP tanfolyam panel" at 3850,3525 h60
  text "(c) Horváth Kristóf Sz." at 3850,3475 h60

## Silkscreen, mask and mechanical layers (free items; w line width, h text height)
Top Overlay:
  drawing of 920 lines, arcs and shapes, not listed
  text "BOOT" at 60,3460 h35 r90
  text "RST" at 60,3320 h35 r90
  text "GND" at 1070,3270 h60 r90
  text "PA5" at 1170,3270 h60 r90
  text "PA6" at 1270,3270 h60 r90
  text "PA7" at 1370,3270 h60 r90
  text "PA4" at 1470,3270 h60 r90
  text "PA9" at 1570,3270 h60 r90
  text "PA8" at 1670,3270 h60 r90
  text "PB5" at 1930,3270 h60 r90
  text "PB4" at 2030,3270 h60 r90
  text "PC2" at 2230,3270 h60 r90
  text "PC3" at 2330,3270 h60 r90
  text "PB6" at 2430,3270 h60 r90
  text "PB7" at 2530,3270 h60 r90
  text "PB10" at 770,3220 h60 r90
  text "PB11" at 870,3220 h60 r90
  text "PA10" at 1830,3220 h60 r90
  text "PA15" at 2130,3220 h60 r90
  text "AREF" at 970,3210 h60 r90
  text "IOREF" at 1230,1670 h60 r90
  text "RESET" at 1330,1670 h60 r90
  text "+3,3V" at 1430,1670 h60 r90
  text "+5V" at 1530,1670 h60 r90
  text "GND" at 1630,1670 h60 r90
  text "GND" at 1730,1670 h60 r90
  text "Vin" at 1830,1670 h60 r90
  text "AD0" at 2030,1670 h60 r90
  text "AD1" at 2130,1670 h60 r90
  text "AD2" at 2230,1670 h60 r90
  text "AD3" at 2330,1670 h60 r90
  text "AD10" at 2430,1670 h60 r90
  text "AD11" at 2530,1670 h60 r90
  text "PWR" at 220,1520 h40
Top Solder:
  text "v2.0" at 1560,1940 h40
Bottom Solder:
  text "DSP tanfolyam panel" at 3850,3525 h60
  text "(c) Horváth Kristóf Sz." at 3850,3475 h60
Mechanical 1:
  lines w10: 0,1525 0,3575 25,3600 2540,3600 3860,3600 3920,3540 3920,1560 3860,1500 2575,1500 25,1500 0,1525
Mechanical 2:
  lines w10: 220,1770 220,1870 ; 295,1625 395,1625 ; 450,1765 450,1880 ; 3560,1615 3615,1615 ; 3560,1715 3615,1715 ; 3560,1910 3615,1910 ; 3560,2010 3615,2010 ; 3560,2115 3615,2115 ; 3560,2215 3615,2215 ; 3560,2410 3615,2410 ; 3560,2510 3615,2510 ; 3560,2615 3615,2615 ; 3560,2715 3615,2715 ; 3560,2910 3615,2910 ; 3560,3010 3615,3010 ; 3785,1785 3785,1840 ; 3785,2285 3785,2340 ; 3785,2785 3785,2840

## Text inside footprints (layer, text, board x,y; h text height)
J6: Bottom Overlay "1" at 1110,1695 h35 r180; Bottom Overlay "2" at 1190,1695 h35 r180; Bottom Overlay "3" at 1270,1695 h35 r180
J7: Bottom Overlay "1" at 1410,1695 h35 r180; Bottom Overlay "2" at 1490,1695 h35 r180; Bottom Overlay "3" at 1570,1695 h35 r180
J8: Mechanical 1 "PCB Edge" at 1580,2651 h9.84 r180
J9: Top Overlay "1" at 1275,2575 h35; Top Overlay "2" at 1345,2575 h35; Top Overlay "3" at 1430,2575 h35
MIC1: Top Overlay "MIC" at 3615,3375 h60
P7: Top Overlay "1" at 2485.51,2678.03 h50 r270; Top Overlay "2" at 2585.51,2698.03 h50 r270; Top Overlay "5" at 2485.51,2338.03 h50 r270; Top Overlay "6" at 2585.51,2338.03 h50 r270